# EAGLE board Autopilot-8 (EAGLE 7.3.0)
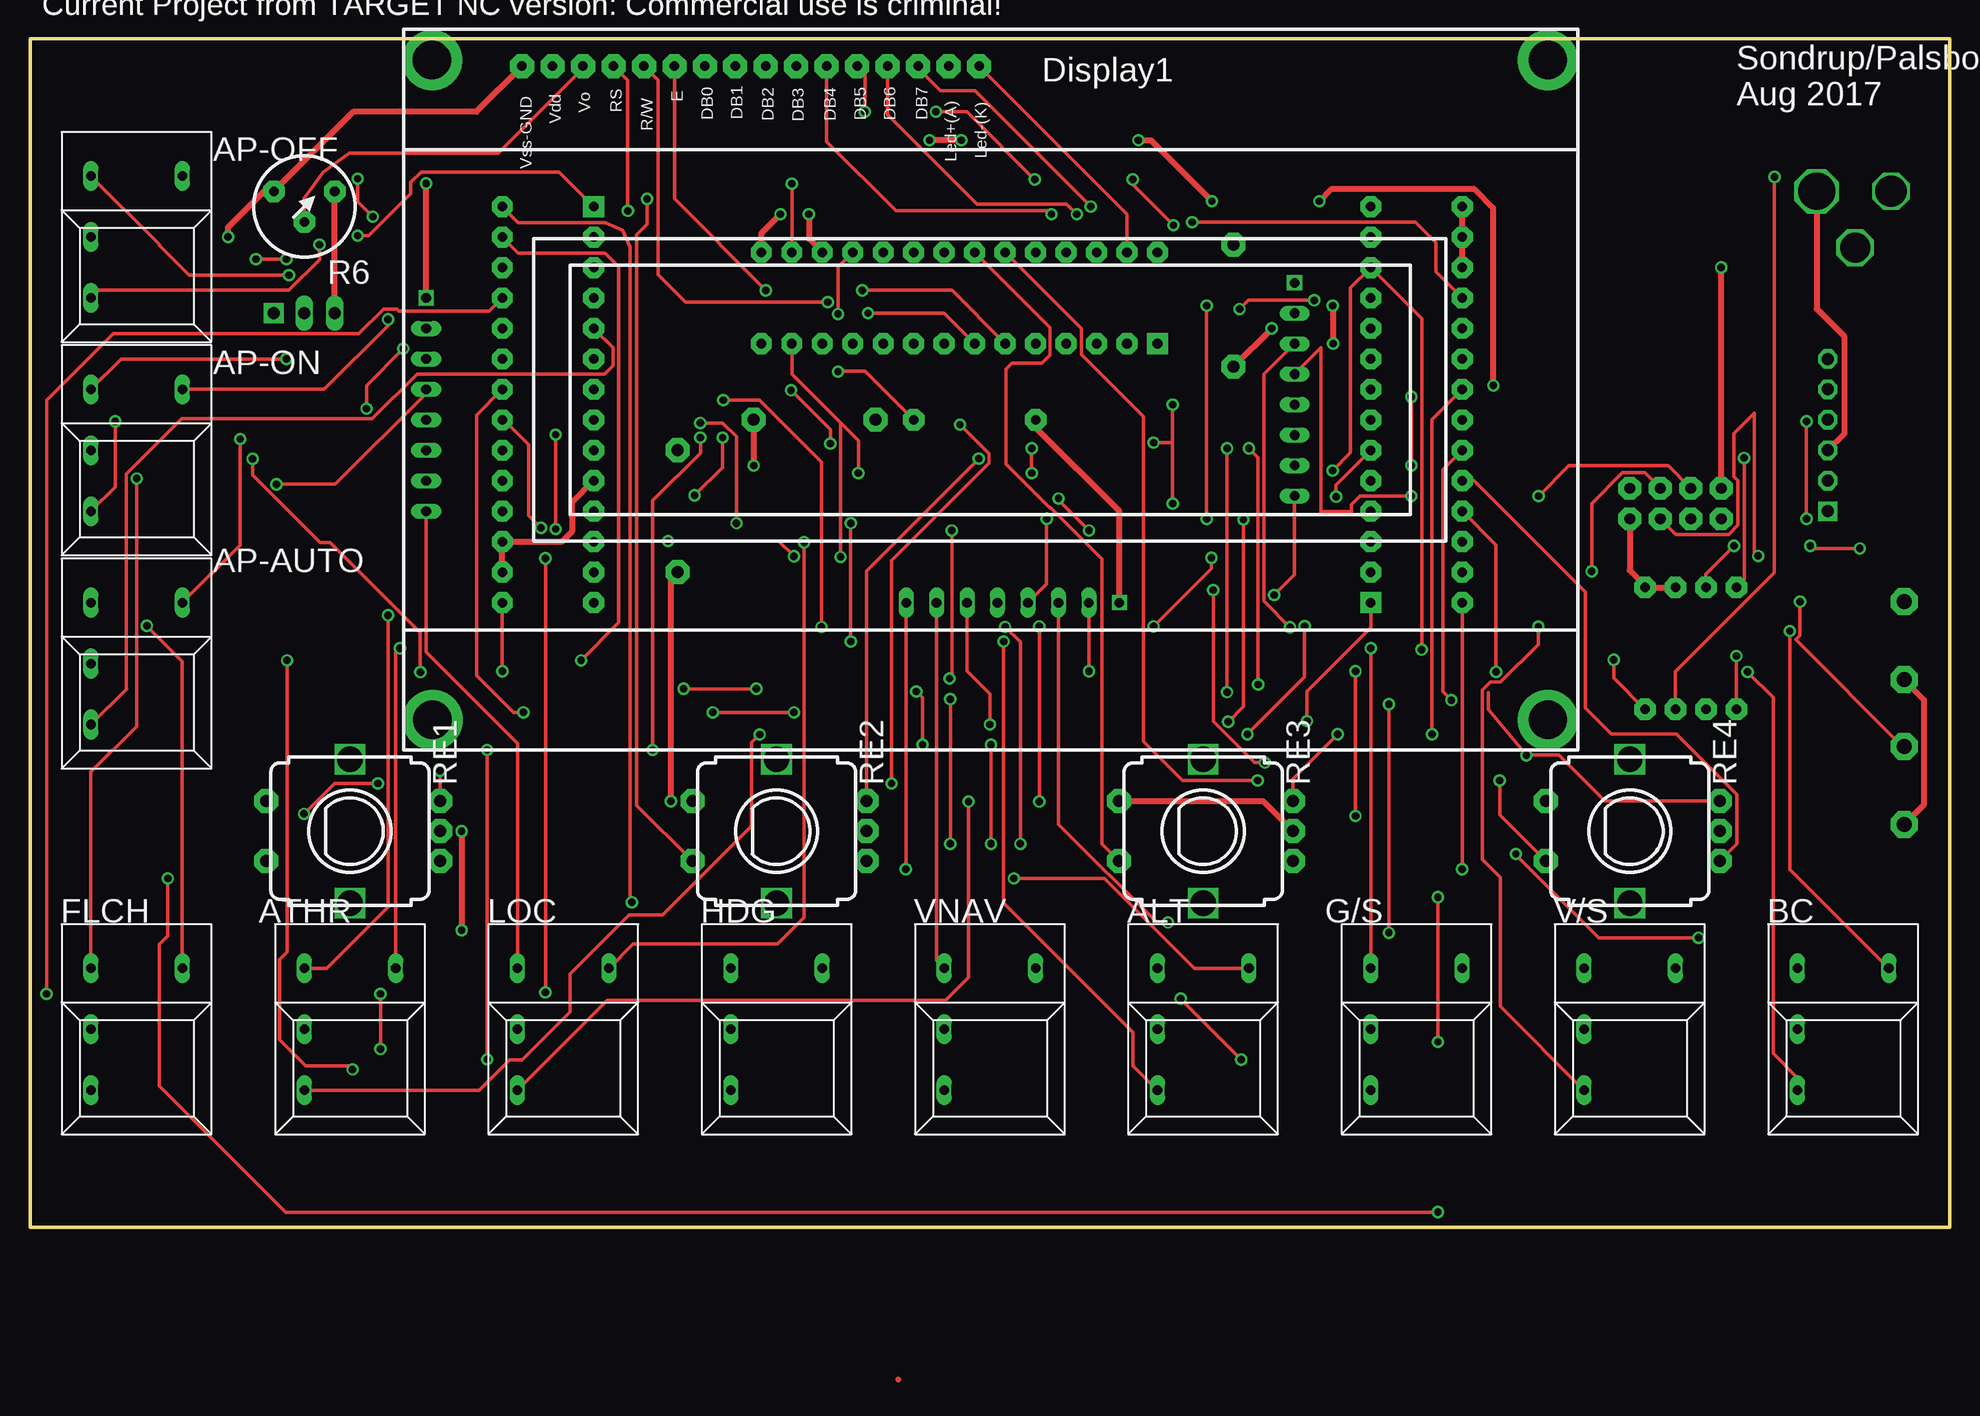
[diagram p0: board, top side]
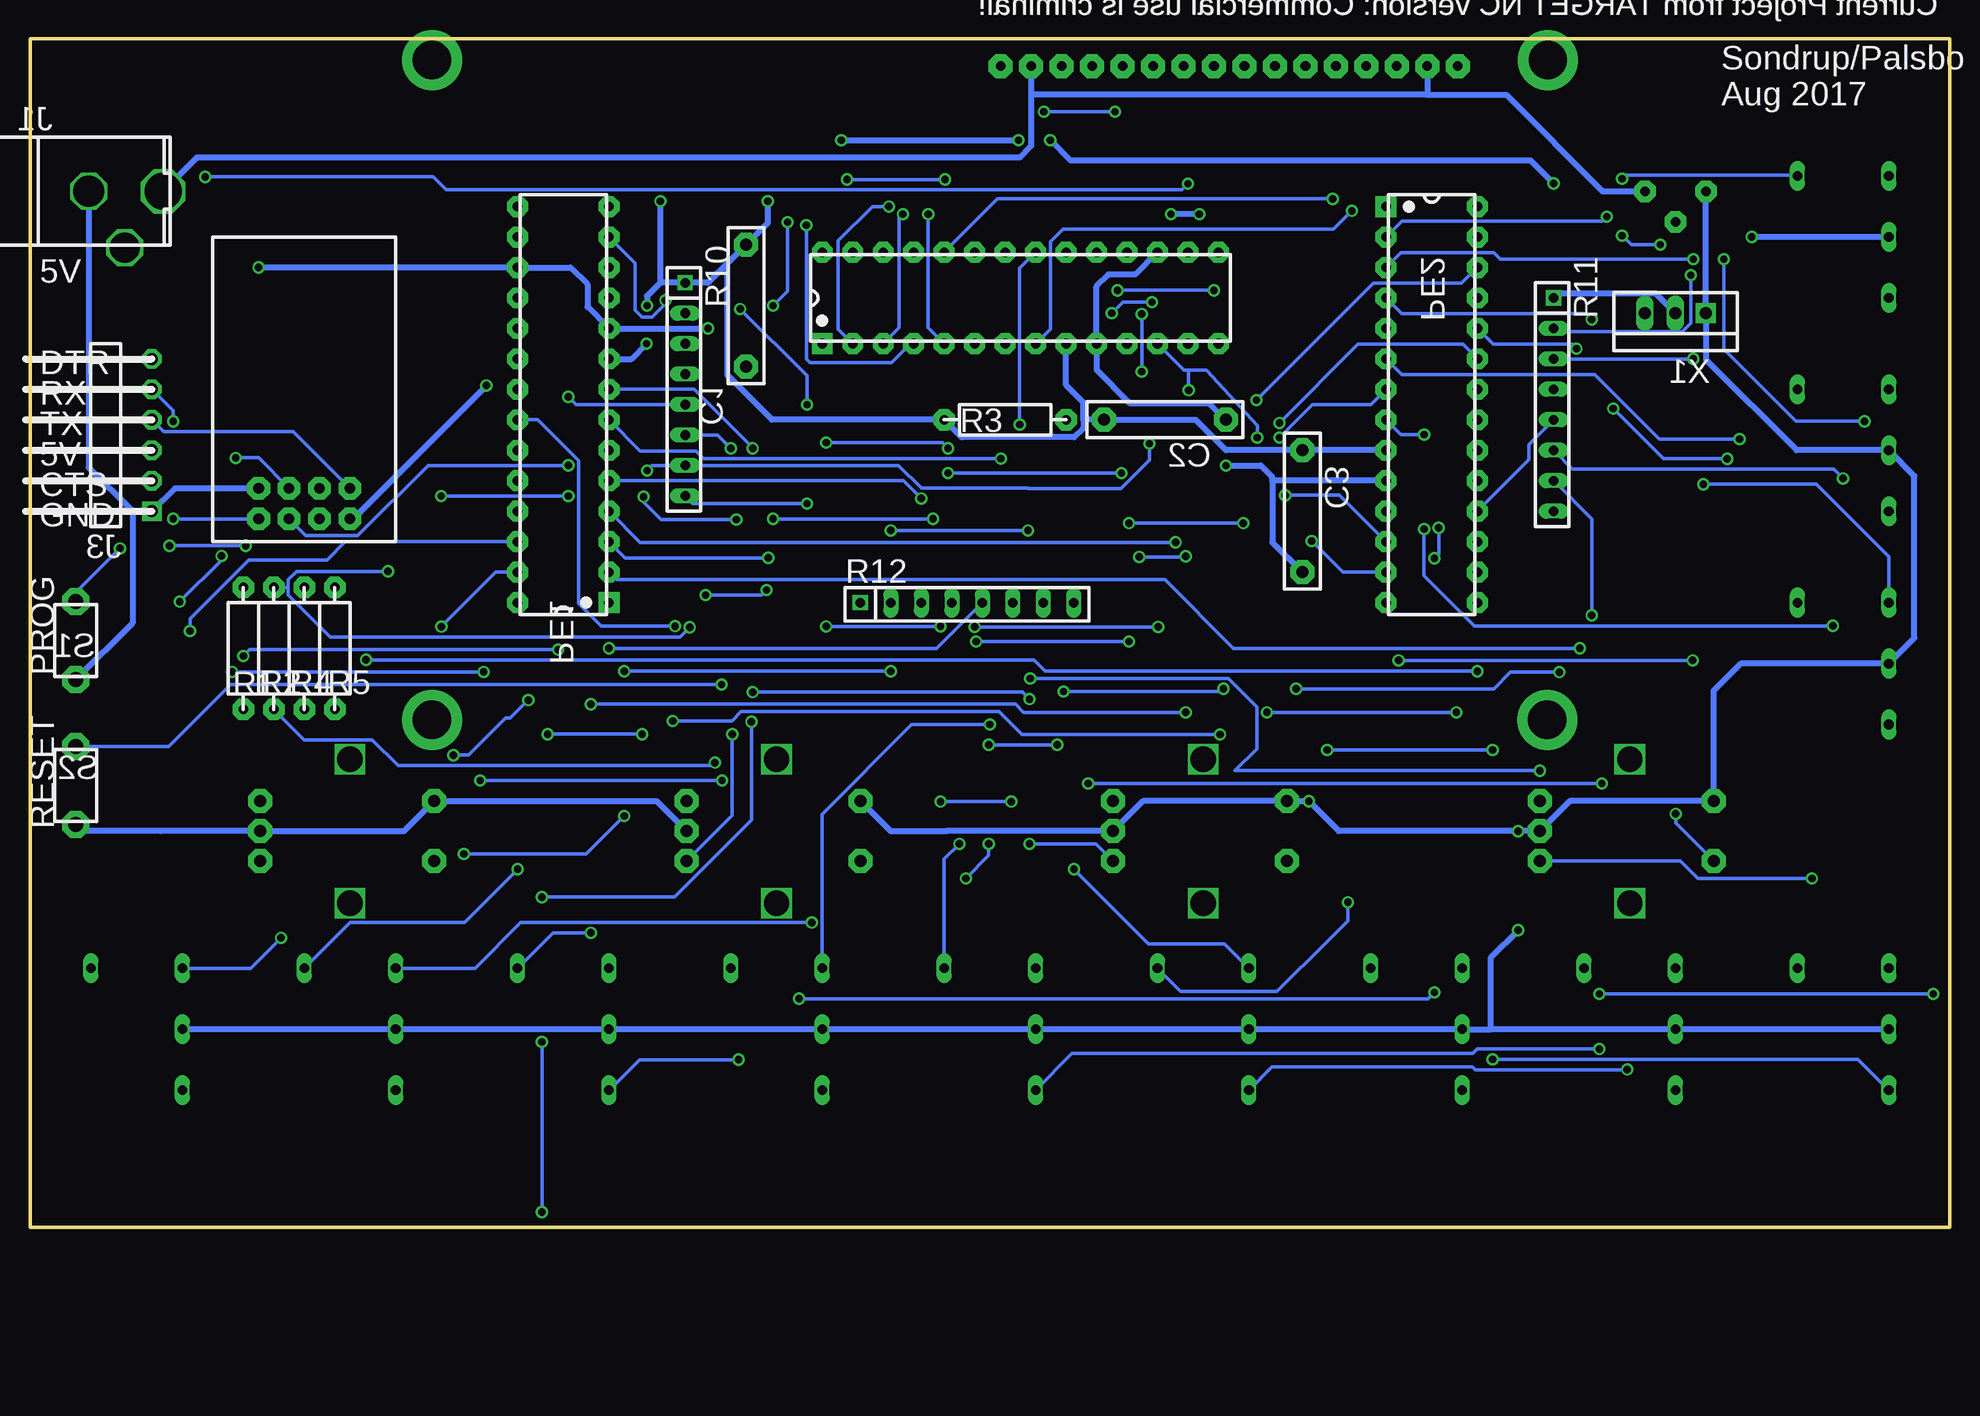
[diagram p1: board, bottom side, seen from below]

Size 160.02 x 99.06 mm. Coordinates in mm from the lower left corner, seen from the top.
Outline: 160.02,0 160.02,99.06 0,99.06 0,0 160.02,0
Copper layers (1*16): Top 0.035mm / dielectric 1.5mm / Bottom 0.035mm
Design rules "TARGET3001!": minimum track width 0.2794mm, minimum drill 0.6096mm, track to track 0.2032mm, track to pad 0.2032mm, pad to pad 0.2032mm, via to via 0.2032mm, smd to smd 0mm, copper to edge 0mm, drill to drill 0.299974mm, minimum pad ring 0.235mm, minimum via ring 0.2mm, stop-mask expansion 4mil, vias tented up to drill 0mil, thermal gap 10mil

## Footprints (pad centres in the part's own frame; a part is rotated, then mirrored left to right if it is on the bottom)
4X13R10,16_11 = drill 1 pad 2 octagon: 1 0,-5.08; 2 0,5.08
4X13R10,16_12 = drill 1 pad 2 octagon: 1 -5.08,0; 2 5.08,0
4X13R10,16_15 = drill 1 pad 2 octagon: 1 0,5.08; 2 0,-5.08
LCD2004_13 = drill 0.8 pad 2 octagon: 1 -39,26.721; 2 -36.46,26.721; 3 -33.92,26.721; 4 -31.38,26.721; 5 -28.84,26.721; 6 -26.3,26.721; 7 -23.76,26.721; 8 -21.22,26.721; 9 -18.68,26.721; 10 -16.14,26.721; 11 -13.6,26.721; 12 -11.06,26.721; 13 -8.52,26.721; 14 -5.98,26.721; 15 -3.44,26.721; 16 -0.9,26.721 | drill 3.2 pad 5 round: 17 -46.457,-27.788; 18 46.507,-27.788; 19 46.507,27.229; 20 -46.507,27.229
ESP01_6 = drill 0.9 pad 1.9 octagon: 1 -3.81,-10.795; 2 -1.27,-10.795; 3 1.27,-10.795; 4 3.81,-10.795; 5 -3.81,-8.255; 6 -1.27,-8.255; 7 1.27,-8.255; 8 3.81,-8.255
EINLÖT-DC-BUCHSE_2.5MM_36 = drill 3.1 pad 3.7 octagon: 1 -6.65,0 | drill 2.5 pad 3.1 octagon: 2 -3.45,-4.7 | drill 2.6 pad 3.1 octagon: 3 -0.45,0
1X06-90_32 = drill 1 pad 1.6 square: 1 0,0 | drill 1 pad 1.6 octagon: 2 0,2.54; 3 0,5.08; 4 0,7.62; 5 0,10.16; 6 0,12.7
PortExpander_Gehäuse:PDIP-28_4 = drill 0.8 pad 1.74 square: 1 -3.81,-16.51 | drill 0.8 pad 1.74 octagon: 2 -3.81,-13.97; 3 -3.81,-11.43; 4 -3.81,-8.89; 5 -3.81,-6.35; 6 -3.81,-3.81; 7 -3.81,-1.27; 8 -3.81,1.27; 9 -3.81,3.81; 10 -3.81,6.35; 11 -3.81,8.89; 12 -3.81,11.43; 13 -3.81,13.97; 14 -3.81,16.51; 15 3.81,16.51; 16 3.81,13.97; 17 3.81,11.43; 18 3.81,8.89; 19 3.81,6.35; 20 3.81,3.81; 21 3.81,1.27; 22 3.81,-1.27; 23 3.81,-3.81; 24 3.81,-6.35; 25 3.81,-8.89; 26 3.81,-11.43; 27 3.81,-13.97; 28 3.81,-16.51
PortExpander_Gehäuse:PDIP-28_5 = drill 0.8 pad 1.74 square: 1 3.81,16.51 | drill 0.8 pad 1.74 octagon: 2 3.81,13.97; 3 3.81,11.43; 4 3.81,8.89; 5 3.81,6.35; 6 3.81,3.81; 7 3.81,1.27; 8 3.81,-1.27; 9 3.81,-3.81; 10 3.81,-6.35; 11 3.81,-8.89; 12 3.81,-11.43; 13 3.81,-13.97; 14 3.81,-16.51; 15 -3.81,-16.51; 16 -3.81,-13.97; 17 -3.81,-11.43; 18 -3.81,-8.89; 19 -3.81,-6.35; 20 -3.81,-3.81; 21 -3.81,-1.27; 22 -3.81,1.27; 23 -3.81,3.81; 24 -3.81,6.35; 25 -3.81,8.89; 26 -3.81,11.43; 27 -3.81,13.97; 28 -3.81,16.51
PortExpander_Gehäuse:PDIP-28_14 = drill 0.8 pad 1.74 square: 1 16.51,-3.81 | drill 0.8 pad 1.74 octagon: 2 13.97,-3.81; 3 11.43,-3.81; 4 8.89,-3.81; 5 6.35,-3.81; 6 3.81,-3.81; 7 1.27,-3.81; 8 -1.27,-3.81; 9 -3.81,-3.81; 10 -6.35,-3.81; 11 -8.89,-3.81; 12 -11.43,-3.81; 13 -13.97,-3.81; 14 -16.51,-3.81; 15 -16.51,3.81; 16 -13.97,3.81; 17 -11.43,3.81; 18 -8.89,3.81; 19 -6.35,3.81; 20 -3.81,3.81; 21 -1.27,3.81; 22 1.27,3.81; 23 3.81,3.81; 24 6.35,3.81; 25 8.89,3.81; 26 11.43,3.81; 27 13.97,3.81; 28 16.51,3.81
0207_7 = drill 0.8 pad 1.8 octagon: 1 0,-5.08; 2 0,5.08
0207_8 = drill 0.8 pad 1.8 octagon: 1 0,-5.08; 2 0,5.08
0207_17 = drill 0.8 pad 1.8 octagon: 1 -5.08,0; 2 5.08,0
0207_18 = drill 0.8 pad 1.8 octagon: 1 0,-5.08; 2 0,5.08
0207_19 = drill 0.8 pad 1.8 octagon: 1 0,-5.08; 2 0,5.08
POTI_PD84_35 = drill 0.8 pad 1.8 octagon: 1 2.54,1.27; 2 0,-1.27; 3 -2.54,1.27
SIL8_16 = drill 0.8 pad 1.27 square: 1 0,8.89 | drill 0.8 pad 0.235 long: 2 0,6.35; 3 0,3.81; 4 0,1.27; 5 0,-1.27; 6 0,-3.81; 7 0,-6.35; 8 0,-8.89
SIL8_9 = drill 0.8 pad 1.27 square: 1 0,8.89 | drill 0.8 pad 0.235 long: 2 0,6.35; 3 0,3.81; 4 0,1.27; 5 0,-1.27; 6 0,-3.81; 7 0,-6.35; 8 0,-8.89
SIL8_10 = drill 0.8 pad 1.27 square: 1 8.89,0 | drill 0.8 pad 0.235 long: 2 6.35,0; 3 3.81,0; 4 1.27,0; 5 -1.27,0; 6 -3.81,0; 7 -6.35,0; 8 -8.89,0
STEC12E08_3 = drill 1 pad 2 octagon: 1 7.5,-2.5; 2 7.5,0; 3 7.5,2.5; 4 -7,2.5; 5 -7,-2.5 | drill 2.1 pad 2.5 square: VIA_6 0,-6; VIA_7 0,6
STEC12E08_2 = drill 1 pad 2 octagon: 1 7.5,-2.5; 2 7.5,0; 3 7.5,2.5; 4 -7,2.5; 5 -7,-2.5 | drill 2.1 pad 2.5 square: VIA_4 0,-6; VIA_5 0,6
STEC12E08_1 = drill 1 pad 2 octagon: 1 7.5,-2.5; 2 7.5,0; 3 7.5,2.5; 4 -7,2.5; 5 -7,-2.5 | drill 2.1 pad 2.5 square: VIA_2 0,-6; VIA_3 0,6
STEC12E08_0 = drill 1 pad 2 octagon: 1 7.5,-2.5; 2 7.5,0; 3 7.5,2.5; 4 -7,2.5; 5 -7,-2.5 | drill 2.1 pad 2.5 square: VIA_0 0,-6; VIA_1 0,6
KURZHUBTASTER_DURCHSTECKMONT._33 = drill 1.25 pad 2.25 octagon: 1 0,3.25; 2 0,-3.25
KURZHUBTASTER_DURCHSTECKMONT._34 = drill 1.25 pad 2.25 octagon: 1 0,-3.25; 2 0,3.25
TASTER_DIGITAST_STD(#1)(#1)_20 = drill 0.8 pad 1.188 long: 2 -3.81,0; 3 -3.81,-5.08; 4 3.81,5.08; 5 -3.81,5.08
TASTER_DIGITAST_STD(#1)(#1)_21 = drill 0.8 pad 1.188 long: 2 -3.81,0; 3 -3.81,-5.08; 4 3.81,5.08; 5 -3.81,5.08
TASTER_DIGITAST_STD(#1)(#1)_22 = drill 0.8 pad 1.188 long: 2 -3.81,0; 3 -3.81,-5.08; 4 3.81,5.08; 5 -3.81,5.08
TASTER_DIGITAST_STD(#1)(#1)_23 = drill 0.8 pad 1.188 long: 2 -3.81,0; 3 -3.81,-5.08; 4 3.81,5.08; 5 -3.81,5.08
TASTER_DIGITAST_STD(#1)(#1)_24 = drill 0.8 pad 1.188 long: 2 -3.81,0; 3 -3.81,-5.08; 4 3.81,5.08; 5 -3.81,5.08
TASTER_DIGITAST_STD(#1)(#1)_25 = drill 0.8 pad 1.188 long: 2 -3.81,0; 3 -3.81,-5.08; 4 3.81,5.08; 5 -3.81,5.08
TASTER_DIGITAST_STD(#1)(#1)_26 = drill 0.8 pad 1.188 long: 2 -3.81,0; 3 -3.81,-5.08; 4 3.81,5.08; 5 -3.81,5.08
TASTER_DIGITAST_STD(#1)(#1)_27 = drill 0.8 pad 1.188 long: 2 -3.81,0; 3 -3.81,-5.08; 4 3.81,5.08; 5 -3.81,5.08
TASTER_DIGITAST_STD(#1)(#1)_28 = drill 0.8 pad 1.188 long: 2 -3.81,0; 3 -3.81,-5.08; 4 3.81,5.08; 5 -3.81,5.08
TASTER_DIGITAST_STD(#1)(#1)_29 = drill 0.8 pad 1.188 long: 2 -3.81,0; 3 -3.81,-5.08; 4 3.81,5.08; 5 -3.81,5.08
TASTER_DIGITAST_STD(#1)(#1)_30 = drill 0.8 pad 1.188 long: 2 -3.81,0; 3 -3.81,-5.08; 4 3.81,5.08; 5 -3.81,5.08
TASTER_DIGITAST_STD(#1)(#1)_31 = drill 0.8 pad 1.188 long: 2 -3.81,0; 3 -3.81,-5.08; 4 3.81,5.08; 5 -3.81,5.08
TO220_37 = drill 1 pad 1.651 square: 1 -2.54,0 | drill 1 pad 0.326 long: 2 0,0; 3 2.54,0

## Placement (x,y rotation side)
C1  100nF  [4X13R10,16_11]  100.33,76.83 0 top
C2  100nF  [4X13R10,16_12]  65.41,67.31 0 top
C3  100nF  [4X13R10,16_15]  53.98,59.69 0 top
Display1  LCD_2004  [LCD2004_13]  80.01,70.08 0 top
IC2  ESP8266_ESP01  [ESP01_6]  137.16,69.85 0 top
J1  Einlöt-DC-Buchse_2.5  [EINLÖT-DC-BUCHSE_2.5MM_36]  155.57,86.36 0 top
J3  PinHeader_1x06_W_2,54  [1X06-90_32]  149.86,59.69 0 top
PE1  PORTEXPANDER MCP23017  [PortExpander_Gehäuse:PDIP-28_4]  115.57,68.58 0 top
PE2  PORTEXPANDER MCP23017  [PortExpander_Gehäuse:PDIP-28_5]  43.18,68.58 0 top
PE3  PORTEXPANDER MCP23017  [PortExpander_Gehäuse:PDIP-28_14]  77.47,77.47 0 top
R1  330  [0207_7]  142.24,48.26 0 top
R2  330  [0207_8]  139.7,48.26 0 top
R3  3,3K  [0207_17]  78.74,67.31 0 top
R4  3,3K  [0207_18]  137.16,48.26 0 top
R5  3,3K  [0207_19]  134.62,48.26 0 top
R6  10K  [POTI_PD84_35]  22.86,85.09 0 top
R10  8PIN-NW  [SIL8_16]  105.41,69.85 0 top
R11  8PIN-NW  [SIL8_9]  33.02,68.58 0 top
R12  8PIN-NW  [SIL8_10]  81.92,52.07 0 top
RE1  IAS  [STEC12E08_3]  26.67,33.02 0 top
RE2  HDG  [STEC12E08_2]  62.23,33.02 0 top
RE3  ALT  [STEC12E08_1]  97.79,33.02 0 top
RE4  V/S  [STEC12E08_0]  133.35,33.02 0 top
S1  PHAP3362A  [KURZHUBTASTER_DURCHSTECKMONT._33]  156.21,48.9 0 top
S2  PHAP3362A  [KURZHUBTASTER_DURCHSTECKMONT._34]  156.21,36.83 0 top
SD1  TASTER_DIGITAST_STD-LED-SJS  [TASTER_DIGITAST_STD(#1)(#1)_20]  8.89,82.55 0 top
SD2  TASTER_DIGITAST_STD-LED-SJS  [TASTER_DIGITAST_STD(#1)(#1)_21]  8.89,64.77 0 top
SD3  TASTER_DIGITAST_STD-LED-SJS  [TASTER_DIGITAST_STD(#1)(#1)_22]  8.89,46.99 0 top
SD4  TASTER_DIGITAST_STD-LED-SJS  [TASTER_DIGITAST_STD(#1)(#1)_23]  8.89,16.51 0 top
SD5  TASTER_DIGITAST_STD-LED-SJS  [TASTER_DIGITAST_STD(#1)(#1)_24]  26.67,16.51 0 top
SD6  TASTER_DIGITAST_STD-LED-SJS  [TASTER_DIGITAST_STD(#1)(#1)_25]  44.45,16.51 0 top
SD7  TASTER_DIGITAST_STD-LED-SJS  [TASTER_DIGITAST_STD(#1)(#1)_26]  62.23,16.51 0 top
SD8  TASTER_DIGITAST_STD-LED-SJS  [TASTER_DIGITAST_STD(#1)(#1)_27]  80.01,16.51 0 top
SD9  TASTER_DIGITAST_STD-LED-SJS  [TASTER_DIGITAST_STD(#1)(#1)_28]  97.79,16.51 0 top
SD10  TASTER_DIGITAST_STD-LED-SJS  [TASTER_DIGITAST_STD(#1)(#1)_29]  115.57,16.51 0 top
SD11  TASTER_DIGITAST_STD-LED-SJS  [TASTER_DIGITAST_STD(#1)(#1)_30]  133.35,16.51 0 top
SD12  TASTER_DIGITAST_STD-LED-SJS  [TASTER_DIGITAST_STD(#1)(#1)_31]  151.13,16.51 0 top
X1  LM1085IT-3.3  [TO220_37]  22.86,76.2 0 top

## Library data of the parts
C1-C3 Display1 IC2 J1 J3 PE1-PE3 R1-R6 R10-R12 RE1-RE4 S1 S2 SD1-SD12 X1 = TARGET3001!_V18.4.0.86

## Nets
5V: Display1.2 Display1.15 J1.1 J3.3 R6.1 X1.3
ALT: PE2.23 SD9.3
AP-AUTO: PE2.5 SD3.3
AP-OFF: PE2.1 SD1.3
AP-ON: PE2.3 SD2.3
APE2.0: PE2.15 R5.1
ATHR: PE1.1 SD5.3
B: PE1.23 RE4.3
BC: PE1.25 SD12.3
D4: Display1.11 PE3.5
D6: Display1.13 PE3.3
ESP-RST: IC2.2 R10.6 S2.2
FLCH: PE2.7 SD4.3
GND: C1.1 C2.1 C3.2 Display1.1 IC2.8 J1.3 J3.1 PE1.10 PE1.15 PE1.16 PE1.17 PE2.10 PE2.16 PE2.17 PE3.10 PE3.15 PE3.17 R6.3 RE1.2 RE1.4 RE2.2 RE2.4 RE3.2 RE3.4 RE4.2 RE4.4 S1.2 S2.1 SD1.2 SD2.2 SD3.2 SD4.2 SD5.2 SD6.2 SD7.2 SD8.2 SD9.2 SD10.2 SD11.2 SD12.2 X1.1
GPIO0/Prog: IC2.6 R2.2 R10.3 S1.1
GPIO2: IC2.7 R1.2 R10.4
GS: PE2.21 SD10.3
HDG: PE2.27 SD7.3
LED-ALT: PE2.24 SD9.4
LED-AP-AUTP: PE2.6 SD3.4
LED-AP-OFF: PE2.2 SD1.4
LED-AP-ON: PE2.4 SD2.4
LED-ATHR: PE1.2 SD5.4
LED-BC: PE1.26 SD12.4
LED-FLCH: PE2.8 SD4.4
LED-GS: PE2.22 SD10.4
LED-HDG: PE2.28 SD7.4
LED-LOC: PE1.4 SD6.4
LED-VNAV: PE2.26 SD8.4
LED-VS: PE1.28 SD11.4
LOC: PE1.3 SD6.3
PE2A1: PE1.22 RE3.1
PE2B4: PE1.5 RE1.3
PE2B5: Display1.12 PE3.4
PE2B6: PE1.7 RE2.3
R/W: Display1.5 PE3.7
RESET: PE1.18 R12.4
RS: Display1.4 PE3.8
SCL: PE1.12 PE2.12 PE3.12 R1.1 R10.7
SDA: PE1.13 PE2.13 PE3.13 R2.1 R10.8
Sig$24: PE1.21 RE3.3
Sig$27: PE1.8 RE2.1
Sig$29: PE1.6 RE1.1
Sig$107: R12.2 SD12.5
Sig$108: R12.7 SD8.5
Sig$118: IC2.3 R10.5
Sig$129: R12.3 SD11.5
Sig$131: R12.6 SD9.5
Sig$132: R12.8 SD7.5
Sig$137: R11.2 SD1.5
Sig$138: R11.3 SD2.5
Sig$139: R11.4 SD3.5
Sig$140: PE2.18 R11.5
Sig$141: R11.6 SD4.5
Sig$142: R11.7 SD5.5
Sig$143: R11.8 SD6.5
Sig$195: Display1.14 PE3.2
Sig$208: Display1.6 PE3.6
Sig$209: PE3.18 R3.1
Sig$211: PE3.16 R4.1
Sig$230: R12.5 SD10.5
Sig$260: Display1.16 PE3.27
Sig$269: IC2.5 J3.4
ss0: PE3.21 RE1.5
ss1: PE3.22 RE3.5
ss2: PE3.23 RE4.5
ss3: PE3.24 RE2.5
TxD: IC2.4 J3.5
VCC3.3: C1.2 C2.2 C3.1 IC2.1 PE1.9 PE2.9 PE3.9 R3.2 R4.2 R5.2 R10.1 R11.1 R12.1 X1.2
VNAV: PE2.25 SD8.3
Vo: Display1.3 R6.2
VS: PE1.27 SD11.3
xx: PE1.24 RE4.1

## Tracks (layer width: path | path; a pad name or v marks a point on that pad's centre or on a via)
5V
  Top 0.5: J3.3 151.21,66.12 151.21,74.29 148.93,76.57 J1.1 | X1.3 R6.1
  Bottom 0.5: J1.1 146.11,89.18 109.59,89.18 77.54,89.18 76.57,90.15 76.57,94.39 | R6.1 28.95,86.36 36.98,94.39 43.55,94.39 | 43.55,94.39 76.57,94.39 | Display1.15 76.57,94.39 | Display1.2 43.55,94.39
ALT  (via drill 0.61 pad 1.02)
  Top 0.279: SD9.3 91.95,13.46 91.95,16.24 81.16,27.03 v81.16,48.83 | v68.41,58.69 v68.41,48.83 | v58.88,58.69 58.88,65.9 57.73,67.05 v55.88,67.05
  Bottom 0.279: v55.88,67.05 49.32,73.61 47.94,73.61 40.59,73.61 PE2.23 | v81.16,48.83 v68.41,48.83 | v58.88,58.69 v68.41,58.69
AP-AUTO
  Top 0.279: PE2.5 48.59,73.33 48.59,71.81 47.89,71.12 32.25,71.12 28.53,67.4 12.64,67.4 8.04,62.8 8.04,44.9 8.05,44.88 SD3.3
AP-OFF  (via drill 0.61 pad 1.02)
  Top 0.279: PE2.1 44.11,87.97 32.62,87.97 31.75,87.11 31.75,86.18 28.23,82.66 v27.3,82.66 | SD1.3 5.71,78.11 21.55,78.11 24.13,80.68 v24.13,81.92
  Bottom 0.279: v27.3,82.66 26.56,81.92 v24.13,81.92
AP-ON  (via drill 0.61 pad 1.02)
  Top 0.279: SD2.3 7.11,61.72 v7.11,67.19 | v21.38,80.7 v18.84,80.7
  Bottom 0.279: PE2.3 45.76,81.24 38,81.24 37.47,80.7 v21.38,80.7 | v18.84,80.7 18.84,73.21 12.82,67.19 v7.11,67.19
APE2.0  (via drill 0.61 pad 1.02)
  Top 0.279: R5.1 132.01,45.79 v132.01,47.3 | PE2.15 v39.37,46.35
  Bottom 0.279: v132.01,47.3 87.78,47.3 76.35,47.3 75.4,46.35 v39.37,46.35
ATHR  (via drill 0.61 pad 1.02)
  Top 0.279: v60.82,41.08 60.8,41.08 60.14,40.42 60.14,33.44 52.73,26.04 49.92,26.04 45.02,21.14 45.02,17.96 41.03,13.97 39.98,13.97 37.44,11.43 SD5.3 | v106.45,42.21 106.45,44.68 111.76,49.99 PE1.1
  Bottom 0.279: v60.82,41.08 77.33,41.08 79.24,42.99 100.73,42.99 101.51,42.21 v106.45,42.21
B  (via drill 0.61 pad 1.02)
  Top 0.279: 121.57,44.59 121.57,43.16 v124.74,39.35 127.43,39.35 131.26,35.52 RE4.3 | v118.48,43.94 117.77,44.65 117.77,63.12 117.77,63.16 PE1.23
  Bottom 0.279: v118.48,43.94 119.99,42.43 120.39,42.43 123.47,39.35 v124.74,39.35
BC  (via drill 0.61 pad 1.02)
  Top 0.279: v143.16,46.3 145.29,44.16 145.29,14.48 147.32,12.46 SD12.3 | PE1.25 122.2,56.87 v122.2,46.3
  Bottom 0.279: v122.2,46.3 v143.16,46.3
D4  (via drill 0.61 pad 1.02)
  Top 0.279: v85.15,84.45 84.87,84.73 72.17,84.73 66.41,90.49 66.41,94.19 Display1.11
  Bottom 0.279: PE3.5 85.15,74.99 v85.15,84.45
D6  (via drill 0.61 pad 1.02)
  Top 0.279: v87.26,84.45 86.41,85.31 81.02,85.31 78.92,85.31 71.49,92.74 Display1.13
  Bottom 0.279: v87.26,84.45 87.57,84.14 87.57,74.99 PE3.3
ESP-RST  (via drill 0.61 pad 1.02)
  Top 0.279: 143.73,63.41 | v144.05,55.96 143.73,56.29 143.73,63.41 | v101.6,64.93 102.37,64.15 v102.37,45.24 | IC2.2 137.19,57.75 141.59,57.75 142.36,58.53 142.36,62.25 142.02,62.59 142.02,66.17 142.02,66.15 143.73,67.85 143.73,63.41 | v147.54,52.15 147.54,49.33 147.18,48.98 147.17,48.98 156.06,40.08 S2.2
  Bottom 0.279: v147.54,52.15 144.05,55.64 v144.05,55.96 | v101.6,64.93 102.71,66.04 R10.6 | v102.37,45.24 143.28,45.24 148.44,40.08 S2.2
FLCH  (via drill 0.61 pad 1.02)
  Top 0.279: v38.1,14 v38.1,39.79 | v51.9,39.79 51.9,60.56 55.88,64.54 v55.88,65.83
  Bottom 0.279: v55.88,65.83 53.13,68.58 48.26,68.58 PE2.7 | SD4.3 7.65,14 v38.1,14 | v51.9,39.79 v38.1,39.79
GND  (via drill 0.61 pad 1.02)
  Top 0.5: 45.17,59.22 | S1.2 157.88,43.97 157.88,35.26 S2.1 | C1.1 v103.5,74.93 | RE3.2 102.79,35.52 RE3.4 | PE3.17 64.92,82.4 v64.92,84.45 | v62.55,84.45 60.96,82.86 PE3.15 | C3.2 53.42,54.06 v53.42,35.52 | PE2.10 45.17,60.41 45.17,59.22 | Display1.1 37.2,92.99 26.95,92.99 R6.3 19.52,86.36 16.51,83.35 v16.51,82.55 | 45.17,59.22 45.17,57.98 44.34,57.15 PE2.17 PE2.16 | v103.5,74.93 | v35.98,33.02 v35.98,24.77 | IC2.8 v140.97,80.01 | PE1.15 PE1.16 PE1.17 | C2.1 v60.33,63.5 | 72.39,-12.7
  Bottom 0.5: v35.98,24.77 38.24,22.5 38.24,16.51 | S1.2 151.47,50.39 151.47,59.69 | S2.1 155.65,33.02 149.15,33.02 | 151.47,59.69 155.12,63.35 J1.3 | 149.15,33.02 | RE3.2 107.79,35.52 114.46,35.52 RE4.4 128.85,33.02 RE4.2 149.15,33.02 | RE3.4 88.27,33 83.68,33 83.66,33.02 RE2.2 67.23,35.52 RE2.4 v53.42,35.52 50.92,33.02 v35.98,33.02 RE1.2 31.67,35.52 RE1.4 19.67,44.73 17.41,46.99 SD3.2 2.94,49.13 2.94,62.63 SD2.2 12.75,64.77 20.32,72.34 X1.1 R6.3 | PE3.17 67.89,79.43 70.14,79.43 71.12,78.45 PE3.10 71.12,71.48 68.35,68.72 61.73,68.72 C2.1 | C3.2 56.46,57.09 56.46,62.23 | v60.33,63.5 57.43,63.5 56.46,62.53 56.46,62.23 | v62.55,84.45 v64.92,84.45 | 151.47,59.69 J3.1 147.96,61.59 IC2.8 | SD12.2 SD11.2 SD10.2 SD9.2 SD8.2 SD7.2 SD6.2 38.24,16.51 | v140.97,80.01 PE1.17 114.97,80.01 113.56,78.6 113.56,76.73 PE1.10 v103.5,74.93 | PE2.10 56.46,62.23 | 38.24,16.51 SD5.2 SD4.2 | SD1.2 v16.51,82.55
GPIO0/Prog  (via drill 0.61 pad 1.02)
  Top 0.279: v105.03,50.01 102.86,52.19 102.86,71.11 R10.3 | v148.39,56.81 148.62,56.59 v152.53,56.59 | v142.04,56.81 139.7,54.47 R2.2 | IC2.6 134.59,62.89 132.72,62.89 130.18,60.34 v130.18,54.68
  Bottom 0.279: v105.03,50.01 105.83,49.22 135.01,49.22 138.5,52.71 138.5,53.34 | v152.53,56.59 156.21,52.91 S1.1 | v142.04,56.81 v148.39,56.81 | v130.18,54.68 137.8,54.68 138.5,53.98 138.5,53.34 | R2.2 138.5,53.34
GPIO2  (via drill 0.61 pad 1.02)
  Top 0.279: 110.15,59.65 | v142.88,64.13 142.9,64.11 142.9,53.99 R1.2 | v125.75,60.96 128.27,63.48 136.55,63.48 IC2.7 | R10.4 107.61,73.32 107.61,61.11 107.61,59.64 109.07,59.65 110.15,59.65 | 110.15,59.65 110.15,60.26 110.86,60.96 v115.15,60.96
  Bottom 0.279: v142.88,64.13 142.86,64.14 140.98,64.14 IC2.7 | v125.75,60.96 v115.15,60.96
GS  (via drill 0.61 pad 1.02)
  Top 0.279: v100.97,13.97 95.92,19.01 v95.92,19.05 | 41.56,65.22 | v42.96,55.77 v42.96,19.57 | v42.6,58.31 42.58,58.31 41.56,59.33 41.56,65.22 | 41.56,65.22 41.56,65.23 39.48,67.31 PE2.21
  Bottom 0.279: v42.96,19.57 43.49,19.05 v95.92,19.05 | v42.96,55.77 42.6,56.14 v42.6,58.31 | SD10.3 109.22,13.97 v100.97,13.97
HDG  (via drill 0.61 pad 1.02)
  Top 0.279: v26.89,13.15 26.58,13.46 23.14,13.46 22.99,13.46 20.83,15.61 20.83,22.34 21.43,22.94 v21.43,47.26 | v45.94,47.26 49.08,50.4 49.08,80.09 47.95,81.22 40.7,81.22 PE2.27
  Bottom 0.279: v26.89,13.15 26.91,13.13 39.55,13.13 39.79,13.37 56.48,13.37 SD7.3 | v45.94,47.26 v21.43,47.26
LED-ALT  (via drill 0.61 pad 1.02)
  Top 0.279: v73.88,44.66 74.39,44.15 v74.39,40.22 | v31.11,73.24 28.05,70.18 v28.05,68.25 | v60.54,44.89 v54.48,44.89 | v32.54,46.28 32.54,49.56 25.02,57.07 24.17,57.07 18.55,62.7 v18.55,64.06 | v80.1,31.96 v80.1,40.22 | v82.01,29.08 89.56,29.08 97.05,21.59 97.94,21.59 SD9.4
  Bottom 0.279: 48.13,44.89 | v60.54,44.89 60.77,44.66 v73.88,44.66 | v82.01,29.08 80.1,30.98 v80.1,31.96 | v28.05,68.25 23.86,64.06 v18.55,64.06 | v31.11,73.24 31.48,73.6 38.04,73.6 PE2.24 | v54.48,44.89 48.13,44.89 | 48.13,44.89 38,44.89 36.61,46.28 v32.54,46.28 | v80.1,40.22 v74.39,40.22
LED-AP-AUTP  (via drill 0.61 pad 1.02)
  Top 0.279: SD3.4 17.51,56.88 v17.51,65.7
  Bottom 0.279: PE2.6 45.66,71.06 29.57,71.06 24.21,65.7 v17.51,65.7
LED-AP-OFF  (via drill 0.61 pad 1.02)
  Top 0.279: v28.57,84.24 27.3,85.51 v27.3,87.42
  Bottom 0.279: v28.57,84.24 28.94,83.88 45.66,83.88 PE2.2 | v27.3,87.42 27.01,87.71 12.78,87.71 SD1.4
LED-AP-ON  (via drill 0.61 pad 1.02)
  Top 0.279: v29.84,75.68 29.84,75.17 24.52,69.85 23.5,69.85 SD2.4
  Bottom 0.279: v29.84,75.68 30.3,76.14 45.66,76.14 PE2.4
LED-ATHR  (via drill 0.61 pad 1.02)
  Top 0.279: v30.83,48.26 30.48,47.91 SD5.4
  Bottom 0.279: PE1.2 111.12,53.98 65.41,53.98 59.69,48.26 v30.83,48.26
LED-BC  (via drill 0.61 pad 1.02)
  Top 0.279: SD12.4 146.69,29.84 v146.69,49.71
  Bottom 0.279: v146.69,49.71 146.69,50.74 141.79,55.63 135.25,55.63 133.73,57.15 PE1.26
LED-FLCH  (via drill 0.61 pad 1.02)
  Top 0.279: v9.74,50.14 12.7,47.18 SD4.4 | v43.81,66.08 v43.81,58.21
  Bottom 0.279: PE2.8 45.76,66.08 v43.81,66.08 | v43.81,58.21 43.81,54.33 39.62,50.14 v9.74,50.14
LED-GS  (via drill 0.61 pad 1.02)
  Top 0.279: PE2.22 | PE2.22 37.24,67.72 37.24,45.98 40.29,42.92 v41.12,42.92 | v56.91,42.92 v63.68,42.92 | v113.27,24.55 v113.27,43.6
  Bottom 0.279: SD10.4 116.42,24.55 v113.27,24.55 | v63.68,42.92 77.22,42.92 77.89,43.6 v113.27,43.6 | v41.12,42.92 v56.91,42.92
LED-HDG  (via drill 0.61 pad 1.02)
  Top 0.279: v50.16,27.09 50,27.25 50,81.71 49.41,83.12 47.95,83.76 40.7,83.76 PE2.28
  Bottom 0.279: SD7.4 64.11,19.66 56.06,19.66 51.84,23.88 50.16,25.56 v50.16,27.09
LED-LOC  (via drill 0.61 pad 1.02)
  Top 0.279: SD6.4 50.29,23.62 62.31,23.62 64.53,25.84 v64.53,57.09
  Bottom 0.279: PE1.4 109.16,57.09 v64.53,57.09
LED-VNAV  (via drill 0.61 pad 1.02)
  Top 0.279: v81.28,50.05 82.55,48.78 v82.55,31.96 | v65.97,50.05 65.97,63.79 60.81,68.96 v57.78,68.96
  Bottom 0.279: v57.78,68.96 48.06,78.68 40.7,78.68 PE2.26 | v82.55,31.96 83.82,30.69 SD8.4 | v81.28,50.05 v65.97,50.05
LED-VS  (via drill 0.61 pad 1.02)
  Top 0.279: PE1.28 v119.38,29.84
  Bottom 0.279: v119.38,29.84 123.8,25.43 133.32,25.43 SD11.4
LOC  (via drill 0.61 pad 1.02)
  Top 0.279: v93.66,50.09 98.47,54.9 v98.47,55.8 | v78.23,35.48 78.23,20.84 76.32,18.93 48.12,18.93 40.64,11.45 SD6.3 | v84.13,50.09 v84.13,35.48
  Bottom 0.279: PE1.3 110.41,55.8 v98.47,55.8 | v84.13,35.48 v78.23,35.48 | v93.66,50.09 v84.13,50.09
PE2A1  (via drill 0.61 pad 1.02)
  Top 0.279: v101.48,41.1 106.25,45.87 v106.25,50.11
  Bottom 0.279: RE3.1 101.48,34.33 v101.48,41.1 | v106.25,50.11 112.41,50.11 114.3,51.99 114.3,63.9 117.71,67.31 PE1.22
PE2B4  (via drill 0.61 pad 1.02)
  Top 0.279: v76.65,45.74 76.83,45.93 v76.83,58.09 | v88.27,58.09 85.72,60.63 v85.72,60.76 | RE1.3 v34.17,38.06
  Bottom 0.279: v85.72,60.76 87.2,62.23 PE1.5 | v76.65,45.74 60.14,45.74 57.77,43.36 57.77,39.86 59.56,38.06 v34.17,38.06 | v88.27,58.09 v76.83,58.09
PE2B5  (via drill 0.61 pad 1.02)
  Top 0.279: v95.31,83.53 91.92,86.92 v91.92,87.34 | v83.75,87.34 78.1,92.99 76.54,92.99 v75.51,92.99 | Display1.12 69.58,96.16 v69.58,92.99
  Bottom 0.279: v91.92,87.34 v83.75,87.34 | v95.31,83.53 95.31,72.37 95,72.06 88.2,72.06 86.61,73.66 PE3.4 | v69.58,92.99 v75.51,92.99
PE2B6  (via drill 0.61 pad 1.02)
  Top 0.279: v79.09,64.08 69.73,54.72 RE2.3
  Bottom 0.279: PE1.7 109.16,64.71 104.49,64.71 103.86,64.08 v79.09,64.08
R/W  (via drill 0.61 pad 1.02)
  Top 0.279: PE3.7 76.2,76.2 v69.85,76.2 | Display1.5 52.37,95.6 52.37,79.39 54.64,77.11 v66.5,77.11
  Bottom 0.279: v69.85,76.2 68.94,77.11 v66.5,77.11
RESET  (via drill 0.61 pad 1.02)
  Top 0.279: PE1.18 117.19,79.66 117.19,82.07 115.48,83.78 v96.87,83.78 | R12.4 84.75,53.63 v84.75,59.05 | v98.08,59.05 v98.08,76.83
  Bottom 0.279: v98.08,76.83 96.87,78.05 v96.87,83.78 | v84.75,59.05 v98.08,59.05
RS  (via drill 0.61 pad 1.02)
  Top 0.279: Display1.4 49.83,95.6 v49.83,84.73
  Bottom 0.279: v49.83,84.73 51.38,83.19 73.93,83.19 74.97,82.15 74.97,74.89 PE3.8
SCL  (via drill 0.61 pad 1.02)
  Top 0.279: v55.4,61.02 57.73,63.34 v57.73,65.83 | v63.44,69.78 66.71,66.51 v66.71,65.33 | v108.58,63.08 110.07,64.57 110.06,64.58 110.06,76.61 110.06,78.31 PE1.12 116.01,75.76 116,75.75 v116,48.15 | R1.1 v142.24,47.62
  Bottom 0.279: v142.24,47.62 141.71,48.15 v116,48.15 | v108.58,63.08 108.17,63.5 R10.7 87.62,63.5 85.72,61.61 76.83,61.61 76.82,61.6 69.07,61.6 66.71,63.96 v66.71,65.33 | PE3.12 63.85,71.47 63.44,71.47 | PE2.12 50.86,61.02 v55.4,61.02 | 63.44,71.47 61.96,71.46 57.73,66.83 v57.73,65.83 | 63.44,71.47 v63.44,69.78
SDA  (via drill 0.61 pad 1.02)
  Top 0.279: v100.82,76.55 101.55,77.28 v107.05,77.28 | v63.68,55.94 62.41,57.21 v53.18,57.21 | 67.56,67.06 69.05,65.58 v69.05,62.87 | 67.56,67.06 63.5,71.12 PE3.13 | v103.71,52.7 105.41,54.41 R10.8 | 95.25,65.41 v95.25,68.58 | v102.92,38.73 102.06,38.73 98.63,42.16 v98.63,53.12 | v83.5,64.93 v83.5,62.87 | 95.25,65.41 v93.66,65.41 | v95.25,60.33 95.25,65.41 | v67.56,55.88 67.56,67.06
  Bottom 0.279: v95.25,68.58 95.25,70.98 v100.82,76.55 | v63.68,55.94 63.74,55.88 v67.56,55.88 | v83.5,64.93 83.97,65.41 v93.66,65.41 | v102.92,38.73 103.16,38.5 129.34,38.5 131.48,40.64 137.16,40.64 R2.1 | v98.63,53.12 99.05,52.7 v103.71,52.7 | v53.18,57.21 50.58,54.61 PE2.13 | PE1.13 109.57,80.36 109.57,76.45 109,75.88 108.17,75.88 107.05,77 v107.05,77.28 | R10.8 104.78,60.33 v95.25,60.33 | v69.05,62.87 v83.5,62.87
Sig$24  (via drill 0.61 pad 1.02)
  Top 0.279: PE1.21 116.87,67.34 v116.87,41.1 | v109,41.1 105.29,37.38 RE3.3
  Bottom 0.279: v109,41.1 v116.87,41.1
Sig$27  (via drill 0.61 pad 1.02)
  Top 0.279: v99.78,64.93 v99.78,44.61 | v76.72,31.96 v76.72,44.03
  Bottom 0.279: v76.72,44.03 77.3,44.61 v99.78,44.61 | RE2.1 71.17,31.96 v76.72,31.96 | v99.78,64.93 99.78,64.98 104.65,69.85 PE1.8
Sig$29  (via drill 0.61 pad 1.02)
  Top 0.279: v99.88,42.14 101.15,43.41 v101.15,59 | v11.49,29.08 | PE1.6 108.87,61.88 v108.87,60.9 | v117.35,15.45 v117.35,27.52 | v117.35,1.26 21.3,1.26 10.76,11.79 10.76,23.57 11.49,24.3 v11.49,29.08
  Bottom 0.279: v99.88,42.14 99.88,33.94 106.31,27.52 v117.35,27.52 | v101.15,59 107.4,59 108.87,60.47 v108.87,60.9 | v117.35,1.26 v117.35,15.45 | v11.49,29.08 21.01,29.08 22.45,30.52 RE1.1
Sig$107  (via drill 0.61 pad 1.02)
  Top 0.279: v110.49,46.35 v110.49,34.29 | v123.85,31.11 123.85,31.03 130.75,24.13 v139.09,24.13 | R12.2 v88.27,46.35
  Bottom 0.279: v110.49,34.29 113.67,31.11 v123.85,31.11 | v139.09,24.13 141.63,21.59 SD12.5 | v88.27,46.35 v110.49,46.35
Sig$108
  Top 0.279: SD8.5 75.56,22.23 R12.7 | R12.7
Sig$118  (via drill 0.61 pad 1.02)
  Top 0.279: v115.15,63.51 v115.15,69.23
  Bottom 0.279: IC2.3 137.04,57.66 132.69,57.66 126.84,63.51 v115.15,63.51 | v115.15,69.23 115.17,69.23 114.52,68.58 R10.5
Sig$129  (via drill 0.61 pad 1.02)
  Top 0.279: v94.86,25.4 93.92,25.4 85.72,33.59 R12.3
  Bottom 0.279: v94.86,25.4 119.11,25.4 122.92,21.59 SD11.5
Sig$131  (via drill 0.61 pad 1.02)
  Top 0.279: v80.01,41.91 80.01,44.45 78.11,46.35 R12.6
  Bottom 0.279: SD9.5 94,21.61 94,34.43 86.52,41.91 v80.01,41.91
Sig$132  (via drill 0.61 pad 1.02)
  Top 0.279: v73,29.84 73.03,29.87 R12.8
  Bottom 0.279: v73,29.84 66.77,23.62 60.45,23.62 SD7.5
Sig$137  (via drill 0.61 pad 1.02)
  Top 0.279: SD1.5 10.77,81.94 10.77,81.88 13.28,79.38 19.68,79.38 v21.59,79.38
  Bottom 0.279: R11.2 32.76,74.67 22.3,74.67 21.59,75.39 v21.59,79.38
Sig$138  (via drill 0.61 pad 1.02)
  Top 0.279: SD2.5 7.62,72.39 v21.38,72.39
  Bottom 0.279: R11.3 v21.38,72.39
Sig$139  (via drill 0.61 pad 1.02)
  Top 0.279: v20.54,61.94 25.45,61.94 33.02,69.51 R11.4
  Bottom 0.279: v20.54,61.94 17.9,61.94 11.13,61.94 5.08,55.89 SD3.5
Sig$140
  Bottom 0.279: R11.5 35.08,65.25 35.08,63.98 PE2.18
Sig$141  (via drill 0.61 pad 1.02)
  Top 0.279: v8.89,62.42 8.89,41.76 5.08,37.95 SD4.5
  Bottom 0.279: v8.89,62.42 9.68,63.21 31.46,63.21 R11.6
Sig$142  (via drill 0.61 pad 1.02)
  Top 0.279: v29.84,51.02 29.84,26.7 24.73,21.59 SD5.5
  Bottom 0.279: R11.7 29.84,59.05 v29.84,51.02
Sig$143
  Top 0.279: SD6.5 40.64,36.77 40.64,40.34 33.02,47.96 33.02,48.25 R11.8
Sig$195  (via drill 0.61 pad 1.02)
  Top 0.279: v88.42,85.09 78.75,94.76 75.88,94.76 74.03,96.61 Display1.14
  Bottom 0.279: PE3.2 92.66,74.88 92.66,82.23 89.8,85.09 v88.42,85.09
Sig$208  (via drill 0.61 pad 1.02)
  Top 0.279: PE3.6 76.83,78.11 v69.37,78.11 | v61.33,78.11 53.71,85.72 Display1.6
  Bottom 0.279: v69.37,78.11 v61.33,78.11
Sig$209  (via drill 0.61 pad 1.02)
  Top 0.279: v67.35,71.33 67.37,71.36 69.61,71.36 R3.1 | PE3.18 67.35,80.05 v67.35,76.13 | v67.35,71.33
  Bottom 0.279: v67.35,76.13 v67.35,71.33
Sig$211  (via drill 0.61 pad 1.02)
  Top 0.279: v145.41,87.56 145.41,54.58 137.16,46.33 R4.1 | PE3.16 v63.5,87
  Bottom 0.279: 126.4,87.56 | 126.4,87.56 125.33,86.49 64,86.49 v63.5,87 | v145.41,87.56 126.4,87.56
Sig$230  (via drill 0.61 pad 1.02)
  Top 0.279: SD10.5 v111.76,48.26
  Bottom 0.279: R12.5 84.45,48.26 108.58,48.26 | 108.58,48.26 | v111.76,48.26 108.58,48.26
Sig$260
  Top 0.279: Display1.16 91.44,84.47 91.44,82.28 PE3.27
Sig$269
  Bottom 0.279: J3.4 148.88,66.33 138.09,66.33 136.53,64.77 IC2.5
ss0  (via drill 0.61 pad 1.02)
  Top 0.279: v77.53,66.92 79.95,64.5 79.95,63.7 71.82,55.57 v71.82,37 | v22.84,34.46 25.39,37 v28.99,37
  Bottom 0.279: PE3.21 77.53,79.95 v77.53,66.92 | RE1.5 22.84,33.7 v22.84,34.46 | v28.99,37 v71.82,37
ss1
  Top 0.279: 85.04,59.96 85.06,59.98 89.35,55.69 89.35,31.96 RE3.5 | 85.04,59.96 81.37,63.63 81.37,71.54 81.85,72.03 82.97,72.03 | 82.97,72.03 | PE3.22 85.04,74.98 85.04,72.7 84.36,72.03 82.97,72.03 | 85.04,59.96
ss2  (via drill 0.61 pad 1.02)
  Top 0.279: v102.33,37.24 | RE4.5 122.51,34.36 122.51,34.7 v122.51,37.24 | PE3.23 87.63,74.93 87.63,72.75 92.81,67.58 92.81,40.51 96.07,37.24 v102.33,37.24
  Bottom 0.279: v122.51,37.24 v102.33,37.24
ss3  (via drill 0.61 pad 1.02)
  Top 0.279: RE2.5 50.57,35.18 50.57,82.74 51.44,83.61 v51.44,85.72
  Bottom 0.279: PE3.24 79.38,85.72 v51.44,85.72
TxD  (via drill 0.61 pad 1.02)
  Top 0.279: v148.08,67.18 v148.08,59.05
  Bottom 0.279: J3.5 148.08,68.07 v148.08,67.18 | IC2.4 v148.08,59.05
VCC3.3  (via drill 0.61 pad 1.02)
  Top 0.5: v107.47,85.54 108.45,86.52 120.42,86.52 121.97,84.96 v121.97,70.17 | v98.52,85.54 93.44,90.62 v92.39,90.62 | v108.62,73.66 108.58,73.7 v108.58,76.83 | v77.63,90.62 v74.98,90.62 | R3.2 83.82,66.67 90.81,59.69 90.81,55.24 R12.1 | R4.2 R5.2 134.62,53.5 133.35,54.77 IC2.1 | R11.1 v33.02,87.01
  Bottom 0.5: IC2.1 133.09,59.05 v121.97,70.17 | 101.88,80.36 103.5,78.74 R10.1 107.47,78.74 | v74.98,90.62 73.27,88.92 34.92,88.92 v33.02,87.01 | 107.47,78.74 108.58,77.62 v108.58,76.83 | v108.62,73.66 109.89,72.39 PE1.9 | C1.2 98.52,83.72 v98.52,85.54 | C1.2 101.88,80.36 | C1.2 101.88,80.36 | R11.1 32.66,77.83 24.49,77.83 X1.2 | v92.39,90.62 v77.63,90.62 | v121.97,70.17 | 101.88,80.36 101.88,71.02 98.17,67.31 R3.2 82.37,65.86 72.98,65.86 72.21,66.63 72.21,67.31 | 107.47,78.74 v107.47,85.54 | 72.21,67.31 72.21,68.76 73.66,70.21 PE3.9 | C1.2 | 72.21,67.31 C2.2 62.87,67.31 60.33,64.77 C3.1 PE2.9
VNAV  (via drill 0.61 pad 1.02)
  Top 0.279: PE2.25 38.29,76.39 30.74,76.39 30.59,76.53 29.47,76.53 27.41,74.48 6.92,74.48 1.38,68.94 v1.38,19.45 | v29.21,14.86 v29.21,19.45
  Bottom 0.279: SD8.3 73.15,14.48 39.75,14.48 39.37,14.86 v29.21,14.86 | v1.38,19.45 v29.21,19.45
Vo
  Top 0.279: Display1.3 46.09,96.6 39.02,89.53 34.83,89.53 26.6,89.53 24.43,87.95 22.86,85.79 R6.2
VS  (via drill 0.61 pad 1.02)
  Top 0.279: SD11.3 122.56,18.41 122.56,29.18 121.07,30.66 121.07,44.78 121.73,45.44 122.58,45.44 125.73,48.59 v125.73,50.07
  Bottom 0.279: v125.73,50.07 121.19,54.61 PE1.27
xx
  Top 0.279: RE4.1 142.29,31.96 142.29,36.06 137.25,41.1 131.81,41.1 129.63,43.28 129.63,52.96 120.36,62.23 119.51,62.23 PE1.24

## Text on the board
tPlace: Current Project from TARGET NC version: Commercial use is criminal! | Current Project from TARGET NC version: Commercial use is criminal! | Sondrup/Palsbo | Aug 2017 | AP-OFF | AP-ON | AP-AUTO | FLCH | ATHR | LOC | HDG | VNAV | ALT | G/S | V/S | BC
bPlace: Current Project from TARGET NC version: Commercial use is criminal! | Current Project from TARGET NC version: Commercial use is criminal! | Sondrup/Palsbo | Aug 2017 | 5V | DTR | RX | TX | 5V | CTS | GND | PROG | RESET
tStop: Current Project from TARGET NC version: Commercial use is criminal! | Current Project from TARGET NC version: Commercial use is criminal!
bStop: Current Project from TARGET NC version: Commercial use is criminal! | Current Project from TARGET NC version: Commercial use is criminal!